# EAGLE board untitled - Kopia (EAGLE 7.4.0)
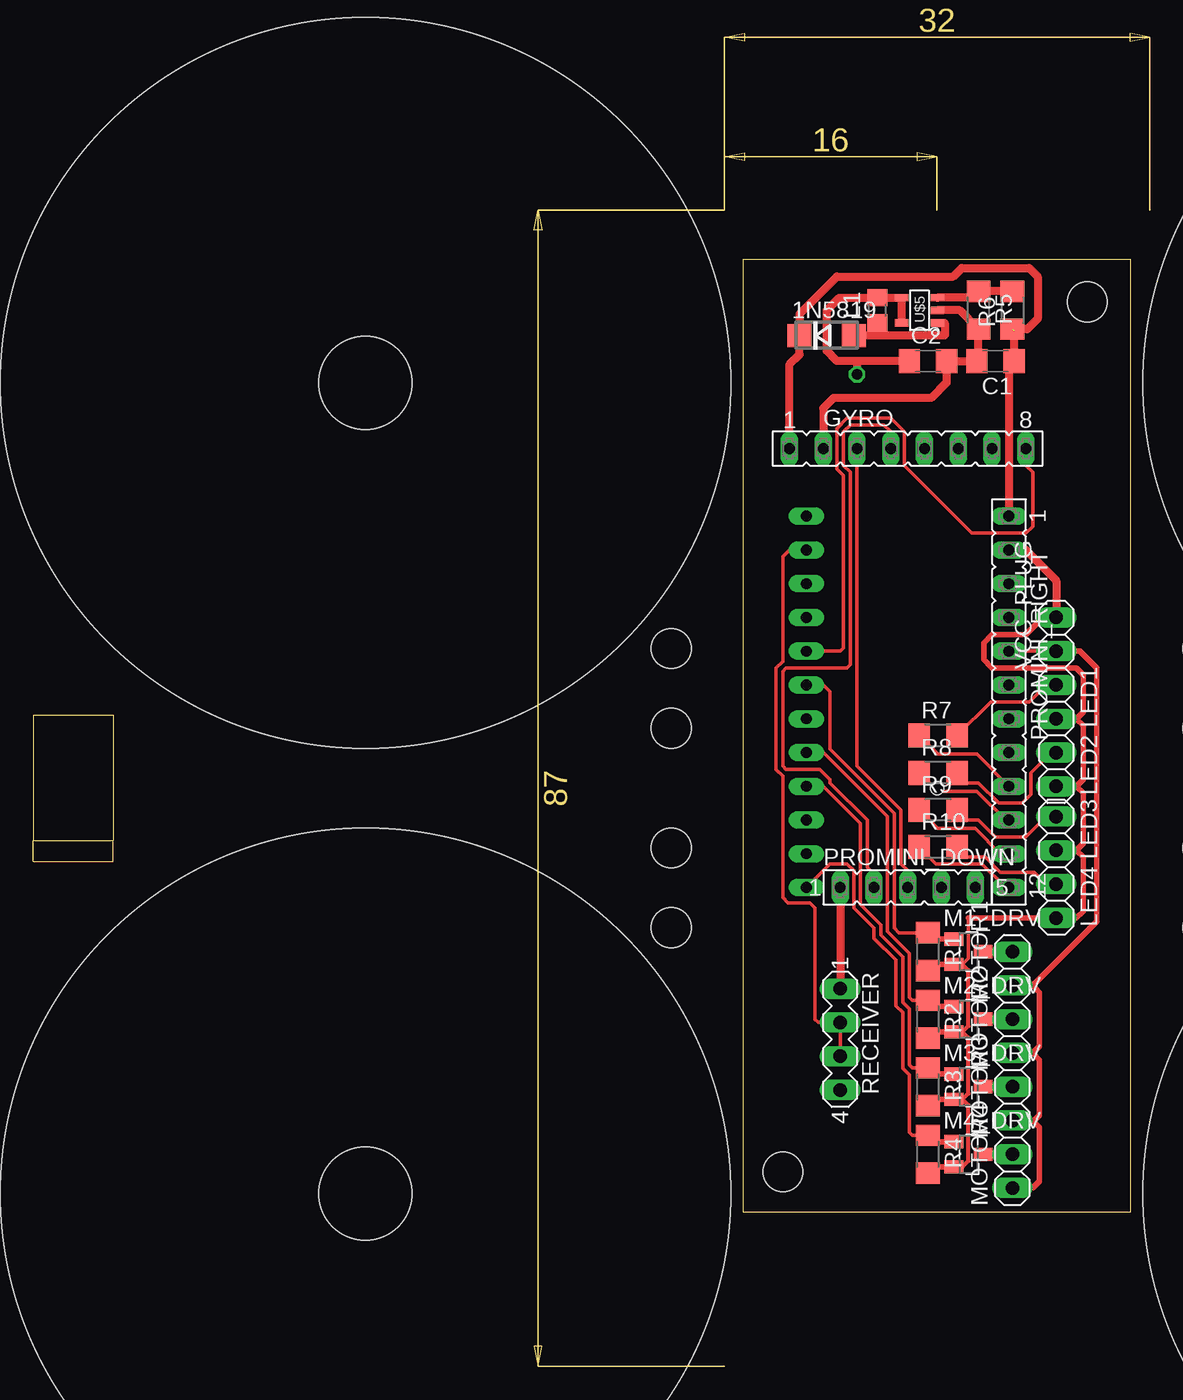
[diagram p0: board, top side]
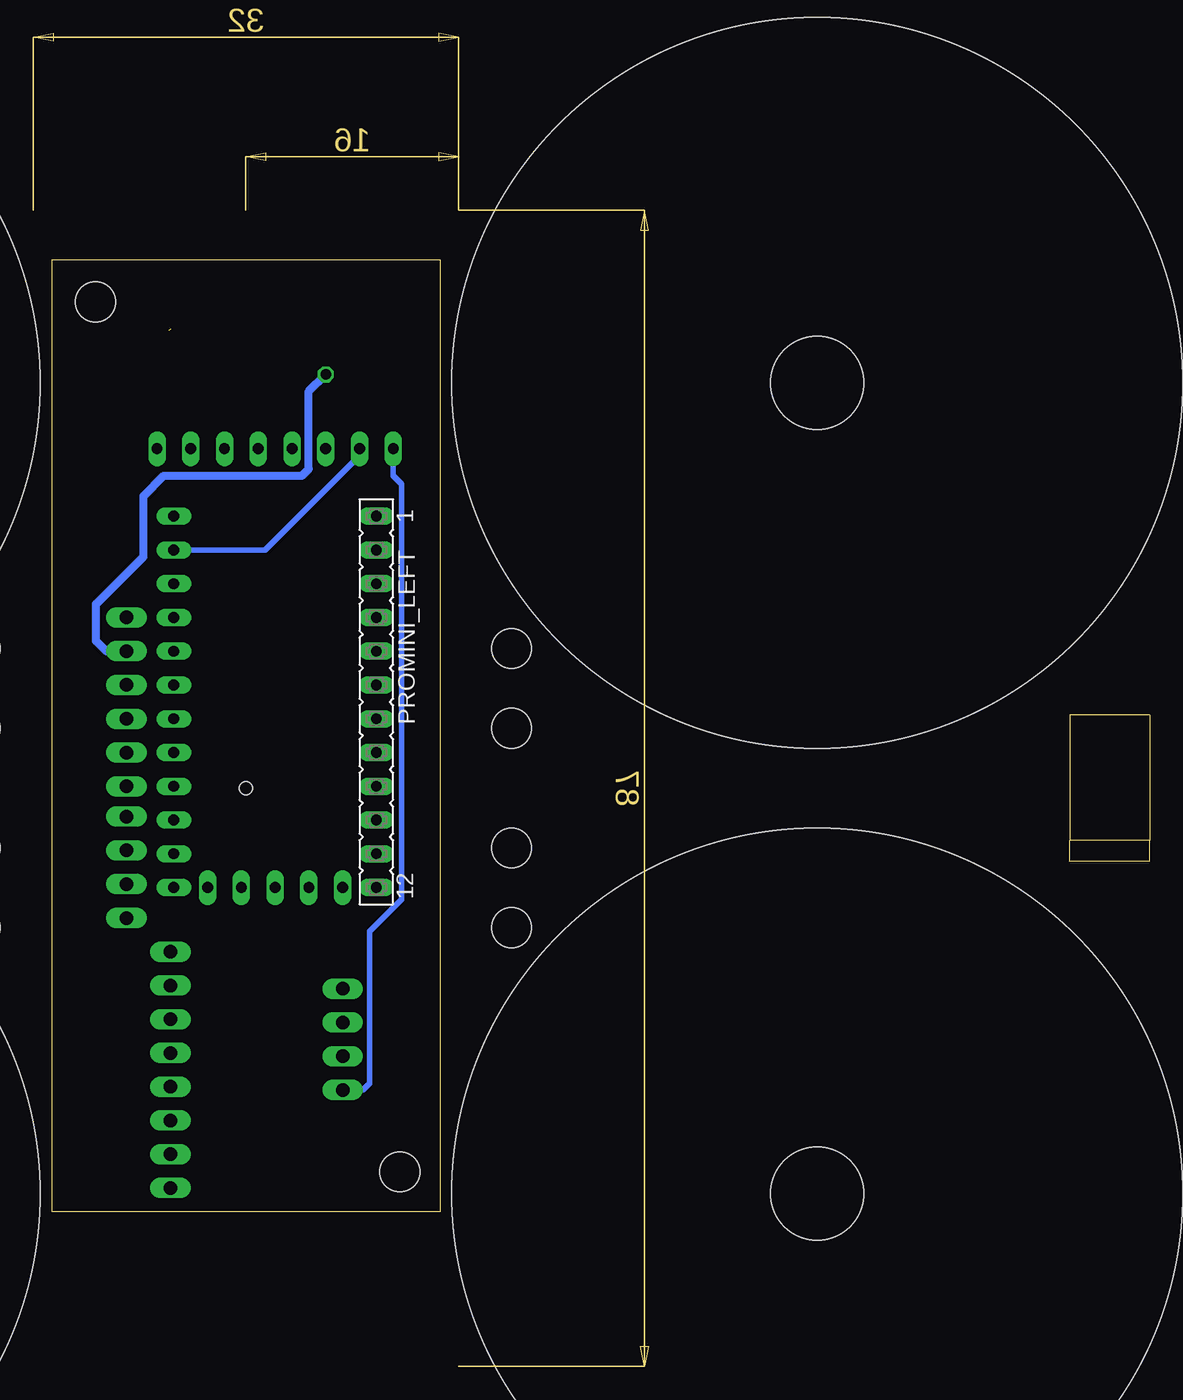
[diagram p1: board, bottom side, seen from below]

Size 82.58 x 71.62 mm. Coordinates in mm from the lower left corner, seen from the top.
Outline: 6,27.94 6,37.36 0,37.36 0,27.94
Outline: 0,27.94 6,27.94
Outline: 0,27.94 0,26.36 6,26.36 6,27.94
Outline: 53.39,0 82.58,0 82.58,71.62 53.39,71.62 53.39,0
Copper layers (1*16): Top 0.035mm / dielectric 1.5mm / Bottom 0.035mm
Design rules "default": minimum track width 10mil, minimum drill 24mil, track to track 8mil, track to pad 8mil, pad to pad 8mil, via to via 8mil, smd to smd 8mil, copper to edge 40mil, drill to drill 8mil, minimum pad ring 10mil, minimum via ring 8mil, stop-mask expansion 4mil, vias tented up to drill 0mil, thermal gap 10mil
Holes 3 mm at 79.32,68.45 56.41,3 88,42.36 88,21.36 48,42.36 48,21.36 88,36.36 88,27.36 48,36.36 48,27.36
Holes 55 mm at 25,62.36 25,1.36 111,62.36 111,1.36
Holes 7 mm at 25,62.36 111,62.36 111,1.36 25,1.36
Holes 1 mm at 68,31.86

## Footprints (pad centres in the part's own frame; a part is rotated, then mirrored left to right if it is on the bottom)
DO214AC = smd 1.8 x 1.7: A 2.05,0; C -2.05,0
C1206 = smd 1.6 x 1.8: 1 -1.4,0; 2 1.4,0
FE08 = drill 0.813 long: 1 -8.89,0; 2 -6.35,0; 3 -3.81,0; 4 -1.27,0; 5 1.27,0; 6 3.81,0; 7 6.35,0; 8 8.89,0
R0805 = smd 1.3 x 1.5: 1 -0.95,0; 2 0.95,0
1X02 = drill 1.016 long: 1 -1.27,0; 2 1.27,0
SOT-23 = smd 1 x 1.4: 1 -0.95,-1.1; 2 0.95,-1.1; 3 0,1.1
FE05-1 = drill 0.813 long: 1 -5.08,0; 2 -2.54,0; 3 0,0; 4 2.54,0; 5 5.08,0
FE12 = drill 0.813 long: 1 -13.97,0; 2 -11.43,0; 3 -8.89,0; 4 -6.35,0; 5 -3.81,0; 6 -1.27,0; 7 1.27,0; 8 3.81,0; 9 6.35,0; 10 8.89,0; 11 11.43,0; 12 13.97,0
R1206 = smd 1.6 x 1.803: 1 -1.422,0; 2 1.422,0
MA04-1 = drill 1.016 long: 1 -3.81,0; 2 -1.27,0; 3 1.27,0; 4 3.81,0
SOT-23-5 = smd 1 x 0.55: 1 -1.35,0.95; 2 -1.35,0; 3 -1.35,-0.95; 4 1.35,-0.95; 5 1.35,0.95

## Placement (x,y rotation side)
1N5819  [DO214AC]  59.7,65.91 0 top
C1  1uF  [C1206]  72.4,64.01 180 top
C2  1uF  [C1206]  67.32,64.01 0 top
GYRO  [FE08]  65.8,57.4 0 top
L1  10uH  [R0805]  63.51,67.82 90 top
LED1  [1X02]  76.98,38.35 270 top
LED2  [1X02]  76.98,33.27 270 top
LED3  [1X02]  76.98,28.45 270 top
LED4  [1X02]  76.98,23.37 270 top
M1_DRV  AO3400A  [SOT-23]  70.37,19.56 270 top
M2_DRV  AO3400A  [SOT-23]  70.37,14.48 270 top
M3_DRV  AO3400A  [SOT-23]  70.37,9.4 270 top
M4_DRV  AO3400A  [SOT-23]  70.37,4.32 270 top
MOTOR1  [1X02]  73.67,18.29 90 top
MOTOR2  [1X02]  73.67,13.21 90 top
MOTOR3  [1X02]  73.67,8.13 90 top
MOTOR4  [1X02]  73.67,3.05 90 top
PROMINI_DOWN  [FE05-1]  65.8,24.38 0 top
PROMINI_LEFT  [FE12]  58.18,38.35 270 bottom
PROMINI_RIGHT  [FE12]  73.42,38.35 270 top
R1  1k  [R1206]  67.32,19.56 270 top
R2  1k  [R1206]  67.32,14.48 270 top
R3  1k  [R1206]  67.32,9.4 270 top
R4  1k  [R1206]  67.32,4.32 270 top
R5  1k  [R1206]  71.13,67.82 270 top
R6  3k  [R1206]  73.67,67.82 90 top
R7  220  [R1206]  68.09,35.81 0 top
R8  220  [R1206]  68.09,33.02 0 top
R9  220  [R1206]  68.09,30.23 0 top
R10  220  [R1206]  68.09,27.43 0 top
RECEIVER  [MA04-1]  60.72,12.95 270 top
U$5  [SOT-23-5]  66.69,67.82 180 top
VCC_PLUG  [1X02]  76.98,43.43 90 top

## Library data of the parts
1N5819 = diode
C1 C2 L1 R1-R10 = resistor
GYRO PROMINI_DOWN PROMINI_LEFT PROMINI_RIGHT = con-lsta; OC_FARNELL: unknown; OC_NEWARK: unknown
LED1-LED4 MOTOR1-MOTOR4 VCC_PLUG = pinhead
M1_DRV M2_DRV M3_DRV M4_DRV U$5 = smd-footprints
RECEIVER = con-lstb; OC_FARNELL: unknown; OC_NEWARK: unknown

## Nets
4: PROMINI_LEFT.7
7: PROMINI_LEFT.10
8: PROMINI_LEFT.11
10: PROMINI_RIGHT.12 R10.1
11: PROMINI_RIGHT.11 R9.1
12: PROMINI_RIGHT.10 R8.1
13: PROMINI_RIGHT.9 R7.1
+5V: 1N5819.C C1.1 GYRO.1 PROMINI_RIGHT.1 R6.1 RECEIVER.4
A0: PROMINI_RIGHT.8
A1: PROMINI_RIGHT.7
A2: PROMINI_RIGHT.6
A6: PROMINI_DOWN.4
A7: PROMINI_DOWN.5
AD0: GYRO.7
GND: C1.2 C2.2 GYRO.2 LED1.2 LED2.2 LED3.2 LED4.2 M1_DRV.2 M2_DRV.2 M3_DRV.2 M4_DRV.2 PROMINI_RIGHT.2 R1.2 R2.2 R3.2 R4.2 R5.2 U$5.2 VCC_PLUG.2
GND2: PROMINI_LEFT.4
INT: GYRO.8 PROMINI_LEFT.5
M1_IN: M1_DRV.1 PROMINI_LEFT.6 R1.1
M1_OUT: M1_DRV.3 MOTOR1.2
M2_IN: M2_DRV.1 PROMINI_LEFT.8 R2.1
M2_OUT: M2_DRV.3 MOTOR2.2
M3_IN: M3_DRV.1 PROMINI_LEFT.9 R3.1
M3_OUT: M3_DRV.3 MOTOR3.2
M4_IN: M4_DRV.1 PROMINI_LEFT.12 R4.1
M4_OUT: M4_DRV.3 MOTOR4.2
N$1: LED4.1 R10.2
N$2: 1N5819.A L1.1 U$5.1
N$3: R5.1 R6.2 U$5.3
N$4: LED3.1 R9.2
N$5: LED2.1 R8.2
N$6: LED1.1 R7.2
PRO_MINI_VCC: PROMINI_RIGHT.4
RECEIVER_GND: PROMINI_DOWN.1 RECEIVER.1
RST1: PROMINI_LEFT.3
RST2: PROMINI_RIGHT.3
RX: PROMINI_LEFT.2 RECEIVER.2 RECEIVER.3
SCL: GYRO.3 PROMINI_DOWN.3
SDA: GYRO.4 PROMINI_DOWN.2
TX: PROMINI_LEFT.1
VCC: C2.1 L1.2 MOTOR1.1 MOTOR2.1 MOTOR3.1 MOTOR4.1 PROMINI_RIGHT.5 U$5.4 U$5.5 VCC_PLUG.1
XCL: GYRO.6
XDA: GYRO.5

## Tracks (layer width: path | path; a pad name or v marks a point on that pad's centre or on a via)
10
  Top 0.254: R10.1 67.93,26.16 71.39,26.16 73.17,24.38 PROMINI_RIGHT.12
11
  Top 0.254: R9.1 68.06,28.83 70.88,28.83 72.78,26.92 PROMINI_RIGHT.11
12
  Top 0.254: R8.1 68.06,31.62 71.01,31.62 73.17,29.46 PROMINI_RIGHT.10
13
  Top 0.254: R7.1 68.06,34.42 71.01,34.42 PROMINI_RIGHT.9
+5V  (1 unrouted)
  Top 0.61: 73.8,66.29 C1.1 73.42,63.62 PROMINI_RIGHT.1 | R6.1 74.79,66.4 75.58,67.18 75.58,70.36 74.94,70.99 69.86,70.99 69.23,70.36 60.47,70.36 57.65,67.55 1N5819.C 57.65,64.5 56.91,63.75 GYRO.1
  Bottom 0.406: RECEIVER.4 59.2,9.14 58.69,9.65 58.69,21.08 56.27,23.5 56.27,54.74 56.91,55.37 GYRO.1
GND
  Top 0.254: 69.93,18.61 70.37,19.05 70.37,22.1
  Top 0.305: 69.8,8.45 M3_DRV.2 69.93,8.45 | 69.8,13.53 M2_DRV.2 69.93,13.53 | 69.93,13.53 70.37,13.97 70.37,18.17 69.93,18.61 M1_DRV.2 | 69.93,8.45 70.37,8.89 70.37,13.09 69.93,13.53 | M4_DRV.2 69.93,3.37 70.37,3.81 70.37,8.01 69.93,8.45
  Top 0.406: R1.2 67.8,18.61 M1_DRV.2 | R2.2 67.8,13.53 M2_DRV.2 | R3.2 67.8,8.45 M3_DRV.2 | R4.2 67.8,3.37 M4_DRV.2 | 70.37,22.1 LED4.2 78.5,22.1 79.01,22.61 79.01,26.67 78.5,27.18 | LED3.2 78.5,27.18 | 78.5,27.18 79.01,27.69 79.01,31.5 78.5,32 | LED2.2 78.5,32 | 78.5,32 79.01,32.51 79.01,36.58 78.5,37.08 | LED1.2 78.5,37.08 | 78.5,37.08 79.01,37.59 79.01,40.39 78.5,40.89 72.15,40.89 71.52,41.53 71.52,42.8 72.15,43.43 74.69,43.43 75.96,44.7 VCC_PLUG.2
  Top 0.61: U$5.2 69.71,67.82 R5.2 71.13,64.14 C1.2 C2.2 68.72,62.36 67.58,61.21 60.21,61.21 59.45,60.45 GYRO.2 | PROMINI_RIGHT.2 74.69,49.78 76.98,47.5 VCC_PLUG.2
  Bottom 0.406: PROMINI_RIGHT.2 66.56,49.78 59.45,56.9 GYRO.2
INT
  Top 0.254: PROMINI_LEFT.5 60.72,42.16 60.97,42.42 60.97,55.37 60.47,55.88 60.47,58.93 61.23,59.69 64.53,59.69 65.55,58.67 65.55,56.13 70.63,51.05 74.69,51.05 75.2,51.56 75.2,55.63 74.69,56.13 GYRO.8
M1_IN
  Top 0.254: PROMINI_LEFT.6 59.45,39.62 59.96,39.12 59.96,34.8 64.78,29.97 64.78,21.34 65.14,20.98 R1.1
  Top 0.406: R1.1 67.8,20.51 M1_DRV.1
M1_OUT
  Top 0.406: M1_DRV.3 MOTOR1.2
M2_IN
  Top 0.254: PROMINI_LEFT.8 59.45,34.54 64.28,29.72 64.28,21.08 65.93,19.43 65.93,16.13 66.16,15.9 R2.1
  Top 0.406: R2.1 67.8,15.43 M2_DRV.1
M2_OUT
  Top 0.406: M2_DRV.3 MOTOR2.2
M3_IN
  Top 0.254: R3.1 66.16,10.82 65.93,11.05 65.93,15.24 65.42,15.75 65.42,19.18 63.77,20.83 63.77,21.59 62.24,23.11 62.24,29.21 59.45,32 PROMINI_LEFT.9
  Top 0.406: R3.1 67.8,10.35 M3_DRV.1
M3_OUT
  Top 0.406: M3_DRV.3 MOTOR3.2
M4_IN
  Top 0.254: PROMINI_LEFT.12 59.96,26.16 61.23,26.16 61.74,25.65 61.74,22.86 63.26,21.34 63.26,20.57 64.91,18.92 64.91,15.49 65.42,14.99 65.42,10.8 65.93,10.29 65.93,5.97 66.16,5.74 R4.1
  Top 0.406: R4.1 67.8,5.27 M4_DRV.1
M4_OUT
  Top 0.406: M4_DRV.3 MOTOR4.2
N$1
  Top 0.254: R10.2 70.27,26.67 71.64,26.67 72.78,25.53 75.33,25.53 76.21,24.64 LED4.1
N$2
  Top 0.61: L1.1 63.51,65.91 | U$5.1 68.59,66.87 68.59,65.91 63.51,65.91 | 63.51,65.91 1N5819.A
N$3
  Top 0.61: R6.2 R5.1 70.66,68.77 U$5.3
N$4
  Top 0.254: R9.2 70.27,29.46 71.13,29.46 72.4,28.19 74.69,28.19 76.21,29.72 LED3.1
N$5
  Top 0.254: R8.2 70.27,32.26 71.13,32.26 72.66,30.73 74.44,30.73 75.07,31.37 75.07,33.02 76.59,34.54 LED2.1
N$6
  Top 0.254: R7.2 72.05,38.35 74.94,38.35 76.21,39.62 LED1.1
RECEIVER_GND
  Top 0.61: PROMINI_DOWN.1 RECEIVER.1
RX
  Top 0.254: PROMINI_LEFT.2 56.91,49.78 56.4,49.28 56.4,41.4 55.89,40.89 55.89,33.27 56.4,32.77 56.4,23.62 56.78,23.24 58.43,23.24 58.81,22.86 58.81,14.48 59.07,14.22 RECEIVER.2 RECEIVER.3
SCL
  Top 0.254: PROMINI_DOWN.3 65.8,25.65 65.29,26.16 65.29,30.23 61.99,33.53 GYRO.3
SDA
  Top 0.254: PROMINI_DOWN.2 63.26,25.4 62.75,25.91 62.75,29.46 59.96,32.26 59.96,32.51 59.2,33.27 57.42,33.27 56.91,33.27 56.66,33.27 56.4,33.53 56.4,40.64 56.66,40.89 61.23,40.89 61.48,41.15 61.48,55.63 60.97,56.13 60.97,58.67 61.48,59.18 64.02,59.18 64.53,58.67 GYRO.4
VCC  (via drill 0.6, 0.8)
  Top 0.254: PROMINI_RIGHT.5 VCC_PLUG.1
  Top 0.406: MOTOR4.1 75.2,1.78 75.71,2.29 75.71,6.35 75.2,6.86 MOTOR3.1 75.33,6.86 75.71,7.24 75.71,11.43 75.2,11.94 | MOTOR2.1 75.2,11.94 | 75.2,11.94 75.71,12.45 75.71,16.51 75.33,16.89 | 75.33,16.89 75.2,17.02 MOTOR1.1 | 75.33,16.89 75.33,17.14 80.02,21.84 80.02,40.89 78.75,42.16 77.23,42.16 76.98,41.91 VCC_PLUG.1
  Top 0.61: U$5.5 U$5.4 L1.2 | L1.2 63.2,68.45 | 61.99,64.01 60.47,64.01 59.7,64.77 59.7,67.82 60.65,68.77 L1.2 | 66.05,63.88 C2.1 61.99,64.01 | 61.99,64.01 v61.99,62.99
  Bottom 0.61: v61.99,62.99 63.26,61.72 63.26,55.88 63.77,55.37 74.18,55.37 75.71,53.85 75.71,49.28 79.26,45.72 79.26,42.93 78.5,42.16 VCC_PLUG.1
  other vias: 76.98,42.16